# EAGLE board Soriano.Isabella_USER.OS-2 (EAGLE 9.6.2)
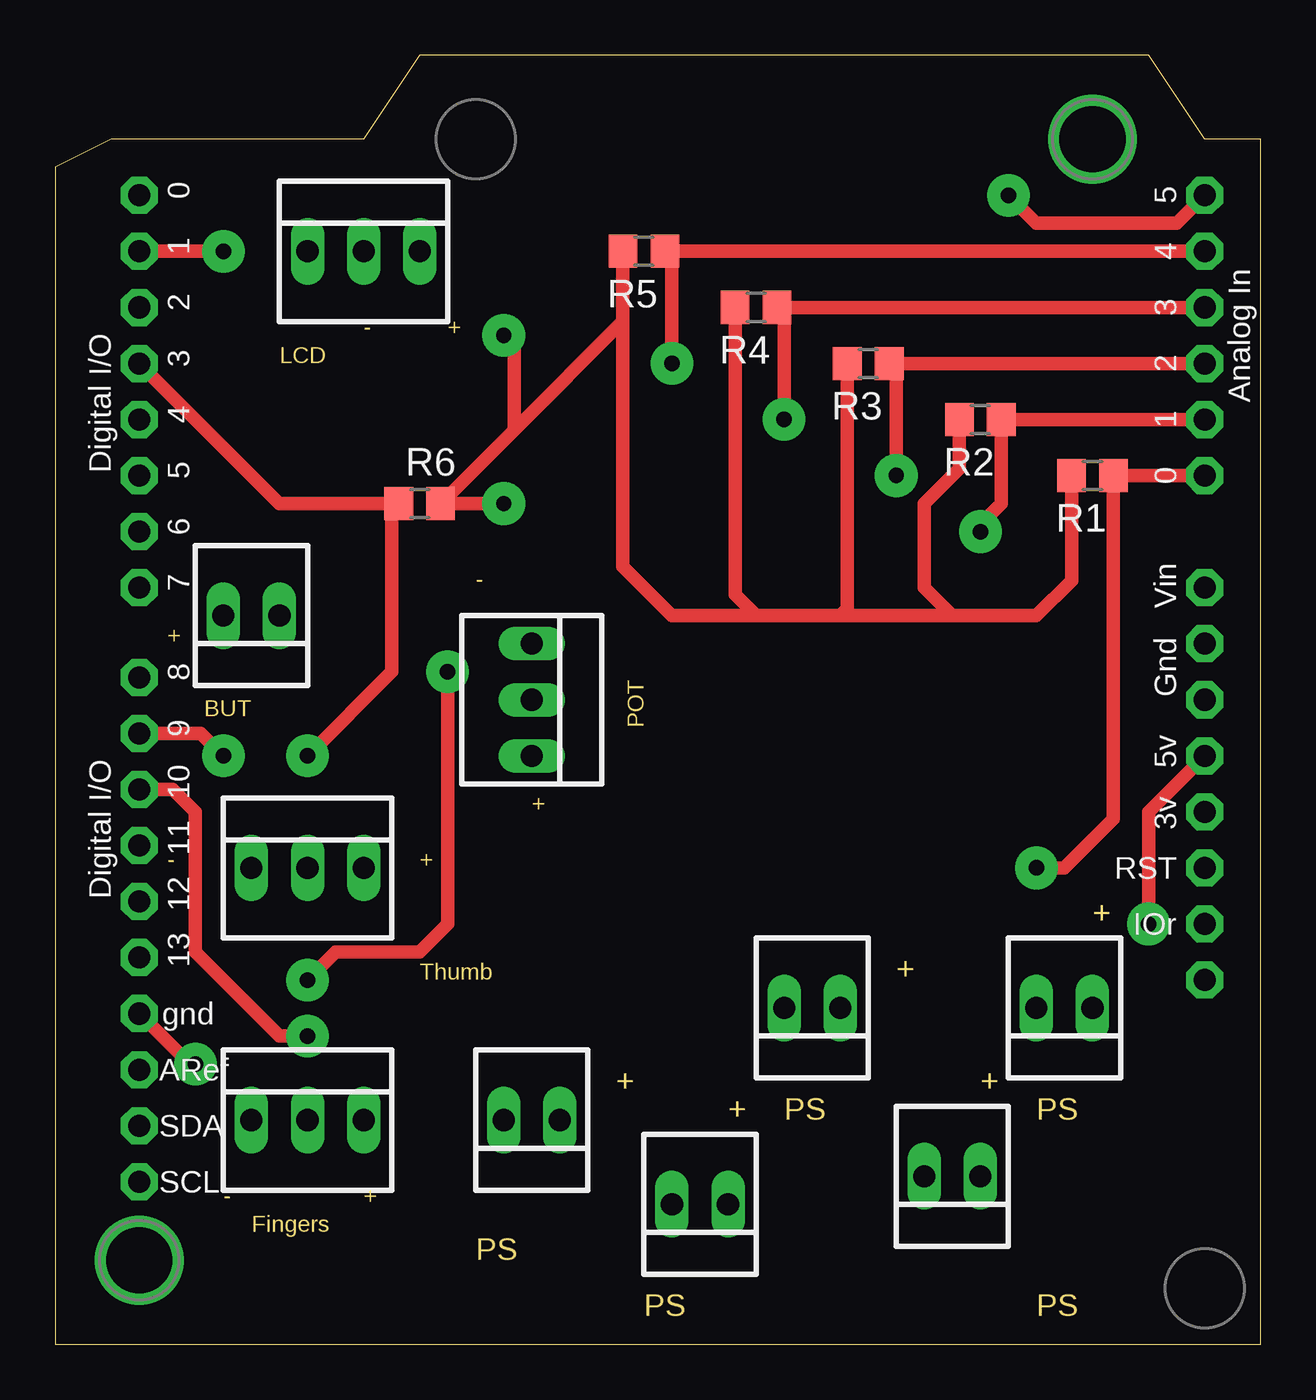
[diagram p0: board, top side]
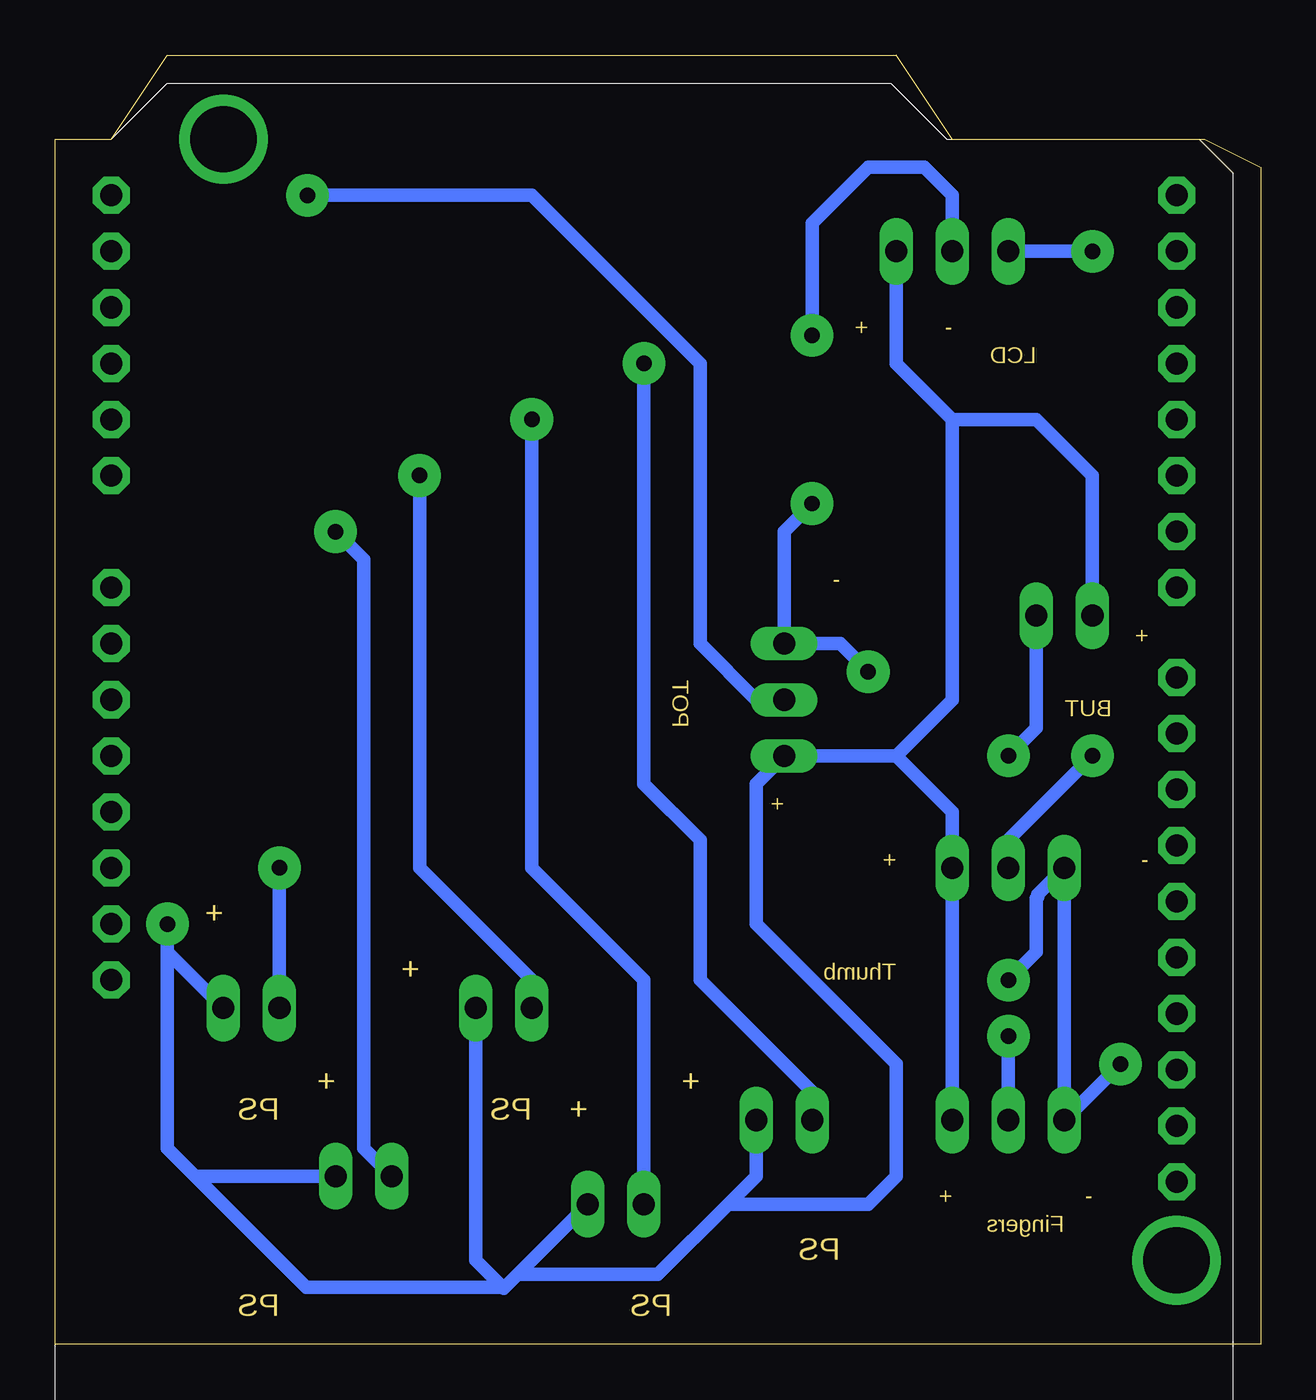
[diagram p1: board, bottom side, seen from below]

Size 54.61 x 58.42 mm. Coordinates in mm from the lower left corner, seen from the top.
Outline: 0,0 54.61,0 54.61,54.61 52.07,54.61 49.53,58.42 16.51,58.42 13.97,54.61 2.54,54.61 0,53.34 0,0
Copper layers (1*16): Top 0.035mm / dielectric 1.5mm / Bottom 0.035mm
Design rules "default *": minimum track width 6mil, minimum drill 0.35mm, track to track 11mil, track to pad 11mil, pad to pad 11mil, via to via 11mil, smd to smd 6mil, copper to edge 40mil, drill to drill 6mil, minimum pad ring 10mil, minimum via ring 8mil, stop-mask expansion 4mil, vias tented up to drill 0mil, thermal gap 10mil

## Footprints (pad centres in the part's own frame; a part is rotated, then mirrored left to right if it is on the bottom)
22-23-2021 = drill 1 long: 1 -1.27,0; 2 1.27,0
22-23-2031 = drill 1 long: 1 -2.54,0; 2 0,0; 3 2.54,0
R0805 = smd 1.3 x 1.5: 1 -0.95,0; 2 0.95,0
ARDUINOR3-BPLACE = drill 1 pad 1.676 octagon: 3V 35.56,2.54; 5V 38.1,2.54; A0 50.8,2.54; A1 53.34,2.54; A2 55.88,2.54; A3 58.42,2.54; A4 60.96,2.54; A5 63.5,2.54; AREF 23.876,50.8; D0 63.5,50.8; D1 60.96,50.8; D2 58.42,50.8; D3 55.88,50.8; D4 53.34,50.8; D5 50.8,50.8; D6 48.26,50.8; D7 45.72,50.8; D8 41.656,50.8; D9 39.116,50.8; D10 36.576,50.8; D11 34.036,50.8; D12 31.496,50.8; D13 28.956,50.8; GND 26.416,50.8; GND1 43.18,2.54; GND2 40.64,2.54; IOREF 30.48,2.54; RESERVED 27.94,2.54; RESET 33.02,2.54; SCL 18.796,50.8; SDA 21.336,50.8; VIN 45.72,2.54

## Placement (x,y rotation side)
BUT  22-23-2021  [22-23-2021]  8.89,33.02 180 top
FINGERS  22-23-2031  [22-23-2031]  11.43,10.16 0 top
LCD  22-23-2031  [22-23-2031]  13.97,49.53 0 top
P22  22-23-2021  [22-23-2021]  40.64,7.62 180 top
POT  22-23-2031  [22-23-2031]  21.59,29.21 270 top
PS1  22-23-2021  [22-23-2021]  45.72,15.24 180 top
PS3  22-23-2021  [22-23-2021]  34.29,15.24 180 top
PS4  22-23-2021  [22-23-2021]  29.21,6.35 180 top
PS5  22-23-2021  [22-23-2021]  21.59,10.16 180 top
R1  100k  [R0805]  46.99,39.37 180 top
R2  100k  [R0805]  41.91,41.91 180 top
R3  100k  [R0805]  36.83,44.45 180 top
R4  100k  [R0805]  31.75,46.99 180 top
R5  100k  [R0805]  26.67,49.53 180 top
R6  1k  [R0805]  16.51,38.1 0 top
THUMB  22-23-2031  [22-23-2031]  11.43,21.59 0 top
U1  ARDUINOR3-BPLACE  [ARDUINOR3-BPLACE]  54.61,-11.43 90 top

## Library data of the parts
BUT P22 PS1 PS3-PS5 = con-molex; MF: MOLEX; MPN: 22-23-2021; OC_FARNELL: 1462926; OC_NEWARK: 25C3832
FINGERS LCD POT THUMB = con-molex; MF: MOLEX; MPN: 22-23-2031; OC_FARNELL: 1462950; OC_NEWARK: 30C0862
R1-R6 = resistor
U1 = adafruit

## Nets
3V: U1.3V
+5V: BUT.2 FINGERS.3 LCD.3 P22.1 POT.3 PS1.1 PS3.1 PS4.1 PS5.1 THUMB.3 U1.5V
GND: FINGERS.1 LCD.2 POT.1 R1.2 R2.2 R3.2 R4.2 R5.2 R6.2 THUMB.1 U1.GND
GND1: U1.GND1
GND2: U1.GND2
N$1: PS1.2 R1.1 U1.A0
N$2: P22.2 R2.1 U1.A1
N$3: PS3.2 R3.1 U1.A2
N$4: PS4.2 R4.1 U1.A3
N$5: LCD.1 U1.D1
N$6: PS5.2 R5.1 U1.A4
N$7: BUT.1 R6.1 U1.D3
N$8: POT.2 U1.A5
N$9: THUMB.2 U1.D9
N$10: FINGERS.2 U1.D10
VIN: U1.VIN

## Tracks (layer width: path | path; a pad name or v marks a point on that pad's centre or on a via)
+5V  (via drill 0.7 pad 1.93)
  Top 0.61: U1.5V 49.53,24.13 v49.53,19.05
  Bottom 0.61: 13.97,41.91 16.51,44.45 LCD.3 | 16.51,26.67 POT.3 22.86,25.4 22.86,19.05 16.51,12.7 16.51,7.62 17.78,6.35 24.13,6.35 | 13.97,41.91 13.97,29.21 16.51,26.67 | BUT.2 7.62,39.37 10.16,41.91 13.97,41.91 | FINGERS.3 THUMB.3 13.97,24.13 16.51,26.67 | v49.53,19.05 49.53,17.78 | 49.53,17.78 PS1.1 | 49.53,17.78 49.53,8.89 48.26,7.62 | 48.26,7.62 P22.1 | 34.24,2.59 43.23,2.59 48.26,7.62 | 34.24,2.59 33.65,3.17 | 34.24,2.59 34.29,2.54 35.56,3.81 PS3.1 | 33.65,3.17 PS4.1 | 33.65,3.17 27.3,3.17 24.13,6.35 | PS5.1 22.86,7.62 24.13,6.35
GND  (via drill 0.7 pad 1.93)
  Top 0.61: 31.75,33.02 27.94,33.02 25.72,35.24 R5.2 25.72,46.36 20.8,41.43 | 31.75,33.02 35.56,33.02 | 35.56,33.02 40.64,33.02 | 40.64,33.02 44.45,33.02 46.04,34.61 R1.2 | 40.64,33.02 39.37,34.29 39.37,38.1 40.96,39.69 R2.2 | R3.2 35.88,33.34 35.56,33.02 | R4.2 30.8,33.97 31.75,33.02 | 20.8,41.43 R6.2 v20.32,38.1 | v20.32,45.72 20.8,45.24 20.8,41.43 | U1.GND 6.1,12.7 v6.35,12.7 | v11.43,16.51 12.7,17.78 16.51,17.78 17.78,19.05 v17.78,30.48
  Bottom 0.61: v20.32,38.1 21.59,36.83 POT.1 19.05,31.75 v17.78,30.48 | LCD.2 13.97,52.07 15.24,53.34 17.78,53.34 20.32,50.8 v20.32,45.72 | v6.35,12.7 FINGERS.1 THUMB.1 10.09,20.39 10.09,20.28 10.16,20.21 10.16,17.78 v11.43,16.51
N$1  (via drill 0.7 pad 1.93)
  Top 0.61: U1.A0 R1.1 47.94,23.81 45.72,21.59 v44.45,21.59
  Bottom 0.61: PS1.2 v44.45,21.59
N$2  (via drill 0.7 pad 1.93)
  Top 0.61: U1.A1 R2.1 42.86,38.1 41.91,37.15 v41.91,36.83
  Bottom 0.61: v41.91,36.83 40.64,35.56 40.64,8.89 P22.2
N$3  (via drill 0.7 pad 1.93)
  Top 0.61: U1.A2 R3.1 38.1,44.13 v38.1,39.37
  Bottom 0.61: PS3.2 33.02,16.51 38.1,21.59 v38.1,39.37
N$4  (via drill 0.7 pad 1.93)
  Top 0.61: R4.1 33.02,46.99 | 33.02,46.99 U1.A3 | v33.02,41.91 33.02,46.99
  Bottom 0.61: PS4.2 27.94,16.51 33.02,21.59 v33.02,41.91
N$5  (via drill 0.7 pad 1.93)
  Top 0.61: v7.62,49.53 U1.D1
  Bottom 0.61: LCD.1 v7.62,49.53
N$6  (via drill 0.7 pad 1.93)
  Top 0.61: U1.A4 R5.1 27.94,49.21 v27.94,44.45
  Bottom 0.61: PS5.2 20.32,11.43 25.4,16.51 25.4,22.86 27.94,25.4 v27.94,44.45
N$7  (via drill 0.7 pad 1.93)
  Top 0.61: U1.D3 10.16,38.1 R6.1 15.24,38.1 15.24,30.48 v11.43,26.67
  Bottom 0.61: BUT.1 10.16,27.94 v11.43,26.67
N$8  (via drill 0.7 pad 1.93)
  Top 0.61: v43.18,52.07 44.45,50.8 50.8,50.8 U1.A5
  Bottom 0.61: POT.2 22.86,29.21 25.4,31.75 25.4,44.45 33.02,52.07 v43.18,52.07
N$9  (via drill 0.7 pad 1.93)
  Top 0.61: U1.D9 6.6,27.69 v7.62,26.67
  Bottom 0.61: THUMB.2 11.43,22.86 v7.62,26.67
N$10  (via drill 0.7 pad 1.93)
  Top 0.61: v11.43,13.97 10.16,13.97 6.35,17.78 6.35,24.13 5.33,25.15 U1.D10
  Bottom 0.61: v11.43,13.97 FINGERS.2
N$11  (via drill 3 pad 1.93)
  other vias: 3.81,3.81
N$12  (via drill 3 pad 1.93)
  other vias: 46.99,54.61

## Text on the board
Milling: - | + | LCD | - | + | BUT | POT | + | - | + | + | Thumb | + | + | + | + | PS | PS | - | + | Fingers | PS | PS | PS